# EAGLE board coil-control-module-v1 (EAGLE 7.1.0)
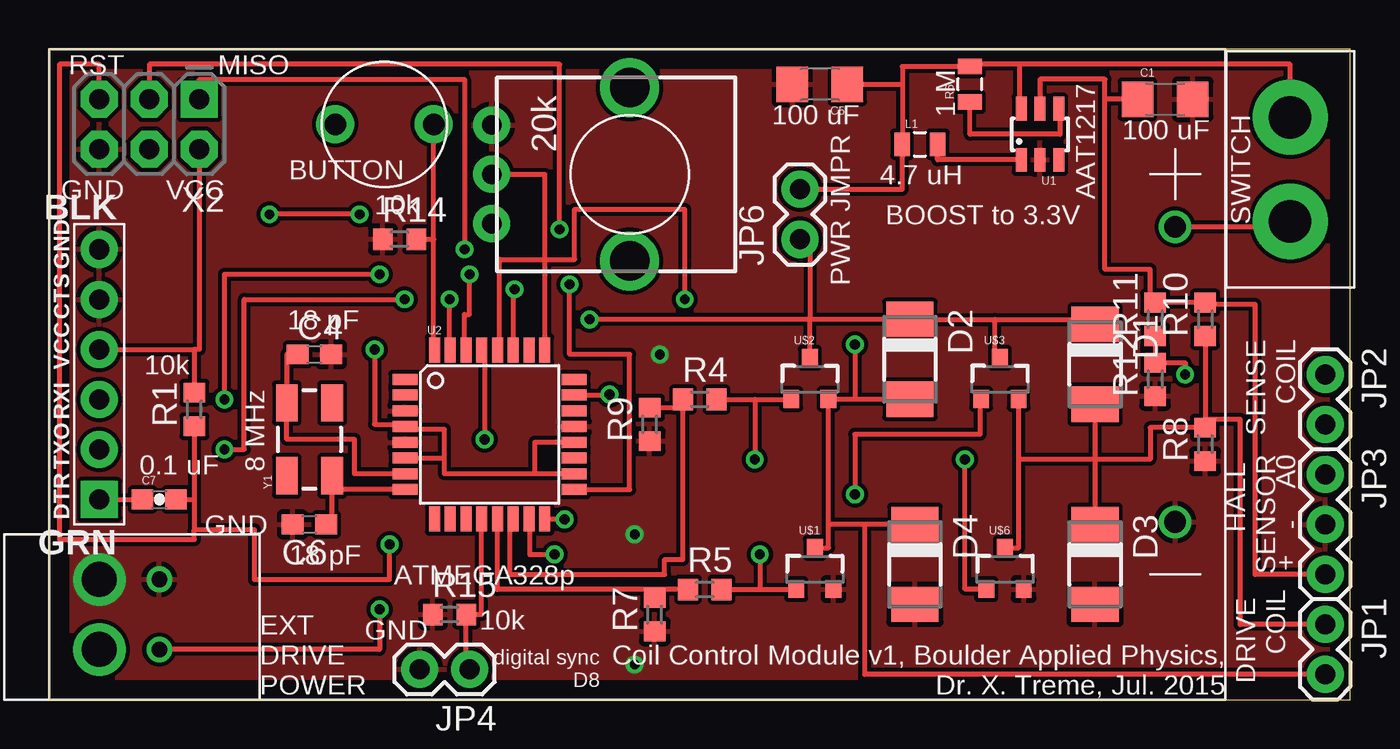
[diagram p0: board, top side]
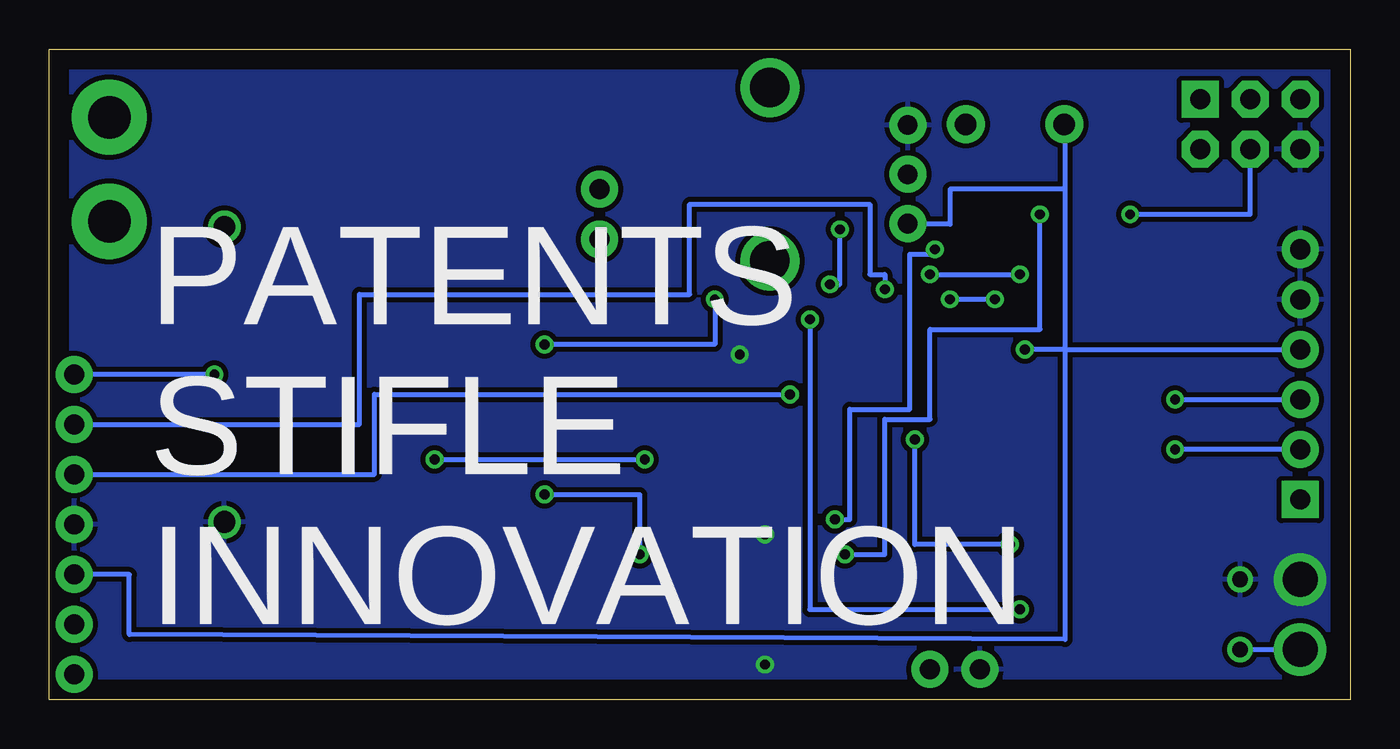
[diagram p1: board, bottom side, seen from below]

Size 66.04 x 33.02 mm. Coordinates in mm from the lower left corner, seen from the top.
Outline: 0,0 66.04,0 66.04,33.02 0,33.02 0,0
Copper layers (1*16): Top 0.035mm / dielectric 1.5mm / Bottom 0.035mm
Design rules "default": minimum track width 10mil, minimum drill 24mil, track to track 8mil, track to pad 8mil, pad to pad 8mil, via to via 8mil, smd to smd 8mil, copper to edge 40mil, drill to drill 8mil, minimum pad ring 10mil, minimum via ring 8mil, stop-mask expansion 4mil, vias tented up to drill 0mil, thermal gap 10mil
Net classes: 1 vcc: width 0.254 mm

## Footprints (pad centres in the part's own frame; a part is rotated, then mirrored left to right if it is on the bottom)
1206 = smd 1.6 x 1.8: 1 -1.4,0; 2 1.4,0
C0603 = smd 1.1 x 1: 1 -0.85,0; 2 0.85,0
0603-CAP = smd 1.1 x 1: 1 -0.85,0; 2 0.85,0
DO-214AC = smd 1.8 x 2.4: A 2.025,0; C -2.025,0
1X02 = drill 1.016 pad 1.88: 1 0,0; 2 2.54,0
1X03 = drill 1.016 pad 1.88: 1 0,0; 2 2.54,0; 3 5.08,0
0805 = smd 0.8 x 1.2: 1 -0.9,0; 2 0.9,0
R0603 = smd 1 x 1.1: 1 -0.85,0; 2 0.85,0
ALPS_POT_KIT = drill 1 pad 1.88: P$1 7,-2.5; P$2 7,0; P$3 7,2.5 | drill 2: P$4 0,-4.4; P$5 0,4.4
SSOT23-6 = smd 0.55 x 1.2: 1 0.95,1.3; 2 0,1.3; 3 -0.95,1.3; 4 -0.95,-1.3; 5 0,-1.3; 6 0.95,-1.3
TQFP32-08 = smd 1.27 x 0.559: 1 -4.293,2.8; 2 -4.293,2; 3 -4.293,1.2; 4 -4.293,0.4; 5 -4.293,-0.4; 6 -4.293,-1.2; 7 -4.293,-2; 8 -4.293,-2.8; 17 4.293,-2.8; 18 4.293,-2; 19 4.293,-1.2; 20 4.293,-0.4; 21 4.293,0.4; 22 4.293,1.2; 23 4.293,2; 24 4.293,2.8 | smd 0.559 x 1.27: 9 -2.8,-4.293; 10 -2,-4.293; 11 -1.2,-4.293; 12 -0.4,-4.293; 13 0.4,-4.293; 14 1.2,-4.293; 15 2,-4.293; 16 2.8,-4.293; 25 2.8,4.293; 26 2,4.293; 27 1.2,4.293; 28 0.4,4.293; 29 -0.4,4.293; 30 -1.2,4.293; 31 -2,4.293; 32 -2.8,4.293
SOT-23 = smd 0.8 x 0.9: 1 -0.95,-1; 2 0.95,-1; 3 0,1.1
AA-DOUBLE-UPSIDE-DOWN = drill 1.1: + 2.54,9.017; - 2.54,24.003
CW182-ND = drill 2.159 pad 3.81: P$1 -2.642,0; P$2 2.642,0
BUTTON = drill 1.1 pad 1.93: P$1 -2.499,0; P$2 2.499,0
SPRING-TERMINAL = drill 0.8: P$1 5.08,1.778; P$2 5.08,5.334
FTDI_DEVICE_SIDE = drill 1.016 pad 1.88 square: P$1 -6.35,0 | drill 1.016 pad 1.88: P$2 -3.81,0; P$3 -1.27,0; P$4 1.27,0; P$5 3.81,0; P$6 6.35,0
2X3-NS = drill 1.016 pad 1.88 square: 1 -2.54,-1.27 | drill 1.016 pad 1.88 octagon: 2 -2.54,1.27; 3 0,-1.27; 4 0,1.27; 5 2.54,-1.27; 6 2.54,1.27
CRYSTAL-SMD-5X3 = smd 1.9 x 1.1: 1 -1.85,-1.15; 2 1.85,-1.15; 3 1.85,1.15; 4 -1.85,1.15

## Placement (x,y rotation side)
C1  100 uF  [1206]  56.64,30.48 0 top
C4  18pF  [C0603]  13.46,17.53 0 top
C5  100 uF  [1206]  39.12,31.24 180 top
C6  18pF  [C0603]  13.21,8.89 180 top
C7  100 nF  [0603-CAP]  5.59,10.16 0 top
D1  [DO-214AC]  53.09,17.02 270 top
D2  [DO-214AC]  43.69,17.27 270 top
D3  [DO-214AC]  53.09,6.86 270 top
D4  [DO-214AC]  43.94,6.86 270 top
JP1  M02PTH  [1X02]  64.77,3.81 270 top
JP2  M02PTH  [1X02]  64.77,16.51 270 top
JP3  [1X03]  64.77,11.43 270 top
JP4  M02PTH  [1X02]  21.34,1.52 180 top
JP6  M02PTH  [1X02]  38.1,23.37 90 top
L1  4.7 uH  [0805]  44.2,28.19 0 top
R1  10K  [R0603]  7.37,14.73 90 top
R4  10K  [R0603]  33.02,15.24 0 top
R5  10K  [R0603]  33.27,5.59 0 top
R6  1M  [0805]  46.74,31.24 90 top
R7  10K  [R0603]  30.73,4.32 90 top
R8  10K  [R0603]  58.67,12.95 90 top
R9  10K  [R0603]  30.48,13.97 90 top
R10  10K  [R0603]  58.67,19.3 90 top
R11  10K  [R0603]  56.13,19.3 90 top
R12  10K  [R0603]  56.13,16.26 90 top
R13  20k  [ALPS_POT_KIT]  29.46,26.67 180 top
R14  10K  [R0603]  17.78,23.37 0 top
R15  10K  [R0603]  20.32,4.32 0 top
U1  AAT1217  [SSOT23-6]  50.29,28.7 180 top
U2  ATMEGA328P  [TQFP32-08]  22.35,13.46 0 top
U$1  IRLML0060  [SOT-23]  38.86,6.6 0 top
U$2  IRLML0060  [SOT-23]  38.61,16.26 0 top
U$3  IRLML0060  [SOT-23]  48.26,16.26 0 top
U$4  AA-DOUBLE-UPSIDE-DOWN  [AA-DOUBLE-UPSIDE-DOWN]  59.69,33.02 180 top
U$5  CW182-ND  [CW182-ND]  62.99,26.92 270 top
U$6  IRLML0060  [SOT-23]  48.51,6.6 0 top
U$7  BUTTON  [BUTTON]  17.02,29.21 0 top
U$8  SPRING-TERMINAL  [SPRING-TERMINAL]  10.67,7.87 180 top
X1  FTDI_DEVICE  [FTDI_DEVICE_SIDE]  2.54,16.51 90 top
X2  [2X3-NS]  5.08,29.21 180 top
Y1  16 MHz  [CRYSTAL-SMD-5X3]  13.21,13.21 90 top

## Library data of the parts
C1 C5 = SparkFun-Capacitors
C4 C6 R1 R4 R5 R7-R12 R14 R15 = resistor
C7 L1 R6 = SparkFun-Passives
D1-D4 = diode
JP1-JP4 JP6 X1 X2 = SparkFun-Connectors
R13 = SparkFun-Electromechanical
U1 U$1-U$8 = spietz-library
U2 = SparkFun-DigitalIC; PROD_ID: IC-09069
Y1 = SparkFun-FreqCtrl

## Nets
/RST: C7.2 R1.1 U2.29 X2.5
A0: JP3.1 U2.23
A2: R13.P$2 U2.25
COILA: D1.A D3.C JP1.1 R8.2 R10.1 U$3.2 U$6.3
COILB: D2.A D4.C JP1.2 U2.28 U$1.3 U$2.2
D2: R14.2 U2.32 U$7.P$2
D5: U2.9
D6: U2.10
D8: JP4.1 R15.2 U2.12
D9: R5.1 R7.2 U2.13
D10: R4.1 R9.2 U2.14
GND: C1.2 C4.2 C5.2 C6.2 D3.A D4.A JP3.2 JP4.2 R7.1 R8.1 R9.1 R12.1 R13.P$1 R14.1 R15.1 U1.2 U2.3 U2.5 U2.21 U$1.2 U$4.- U$6.2 U$8.P$1 X1.P$5 X1.P$6 X2.6
GRN: C7.1 X1.P$1
MISO: U2.16 X2.1
MOSI: U2.15 X2.4
N$4: C4.1 U2.7 Y1.3
N$11: C6.1 U2.8 Y1.1
N$13: JP2.1 R11.1 R12.2
N$14: L1.2 U1.1
N$26: R5.2 U$1.1 U$3.1
N$27: R4.2 U$2.1 U$6.1
RX: U2.30 X1.P$3
SCK: U2.17 X2.3
SENSECOIL: JP2.2 U2.27
SHDN: R6.1 U1.4
TX: U2.31 X1.P$2
VBATT+: U$4.+ U$5.P$2
VCC: C1.1 JP3.3 R1.2 R10.2 R11.2 R13.P$3 U1.5 U2.4 U2.6 U2.18 U2.20 U$7.P$1 X1.P$4 X2.2
VPOWER: D1.C D2.C JP6.1 U$2.3 U$3.3 U$8.P$2
VPOWERBATT: C5.1 JP6.2 L1.1 R6.2 U1.6 U$5.P$1

## Tracks (layer width: path | path; a pad name or v marks a point on that pad's centre or on a via)
/RST  (via drill 0.5)
  Top 0.254: C7.2 7.37,10.16 | U2.29 22.1,17.75 v22.1,13.21 | R1.1 7.37,10.16 | 7.37,10.16 7.37,8.64 | 7.37,8.64 10.41,8.64 10.41,6.1 17.27,6.1 v17.27,7.87 | X2.5 2.54,32.26 0.51,32.26 0.51,8.13 7.37,8.13 7.37,8.64
  Bottom 0.254: v17.27,7.87 22.1,7.87 v22.1,13.21
A0  (via drill 0.5)
  Top 0.254: U2.23 28.19,15.46 v28.45,15.49
  Bottom 0.254: JP3.1 49.53,11.43 49.53,15.49 v28.45,15.49
A2
  Top 0.254: R13.P$2 25.15,26.67 U2.25
COILA
  Top 0.254: U$6.3 49.21,7.7 49.21,12.19 | 49.21,12.19 U$3.2 | 53.09,12.19 D3.C | D1.A 53.09,12.19 | 53.09,12.19 49.21,12.19 | R10.1 58.67,14.22 | 53.09,12.19 55.88,12.19 55.88,13.8 R8.2 58.67,14.22 | JP1.1 60.45,3.81 60.45,14.22 58.67,14.22
COILB  (via drill 0.5)
  Top 0.254: 40.89,15.26 U$2.2 39.56,8.88 | 40.89,15.26 44.2,15.26 44.2,14.99 43.69,14.99 D2.A | U$1.3 39.56,7.7 39.56,8.88 | D4.C 41.4,8.88 | 41.4,8.88 39.56,8.88 | JP1.2 41.4,1.27 41.4,8.88 | U2.28 22.86,17.75 22.86,22.35 26.67,22.35 26.67,24.89 32.26,24.89 v32.26,20.32 | v40.89,18.03 40.89,15.26
  Bottom 0.254: v32.26,20.32 32.26,18.03 v40.89,18.03
D2
  Top 0.254: U2.32 19.52,17.75 19.52,23.37 | 19.52,23.37 U$7.P$2 | R14.2 19.52,23.37
D8
  Top 0.254: JP4.1 21.17,1.52 R15.2 21.95,4.32 U2.12
D9
  Top 0.254: R5.1 30.73,5.59 | 30.73,5.59 R7.2 | 30.73,5.59 22.75,5.59 U2.13
D10
  Top 0.254: R9.2 32.17,14.82 R4.1 32.17,7.11 31.24,7.11 31.24,6.35 23.37,6.35 23.37,9.17 U2.14
GND  (via drill 0.5, 1.78)
  other vias: 29.72,8.38 29.72,1.78 2.54,6.1 30.99,17.53
  pour Top (isolate 0.152): -1.27,35.31 -1.27,-1.27 67.56,-1.52 67.56,34.8
  pour Bottom (isolate 0.254): -2.54,36.2 -2.54,-2.54 69.34,-1.78 69.6,36.45
GRN
  Top 0.254: X1.P$1 C7.1
MISO  (via drill 0.5)
  Top 0.254: X2.1 7.62,31.5 21.08,31.5 v21.08,22.86 | U2.16 26.16,9.17 v26.16,9.14
  Bottom 0.254: v26.16,9.14 25.4,9.14 25.4,14.73 22.35,14.73 22.35,22.61 21.08,22.61 v21.08,22.86
MOSI  (via drill 0.5)
  Top 0.254: U2.15 24.38,9.17 24.38,7.37 v25.65,7.37 | v15.75,24.64 v11.18,24.64
  Bottom 0.254: v25.65,7.37 23.62,7.37 23.62,14.22 21.34,14.22 21.34,18.8 15.75,18.8 v15.75,24.64 | v11.18,24.64 5.08,24.64 X2.4
N$4
  Top 0.254: U2.7 15.49,11.46 15.49,13.21 12.06,13.21 Y1.3 12.06,17.53 C4.1
N$11
  Top 0.254: U2.8 14.87,10.66 Y1.1 14.36,8.89 C6.1
N$13  (via drill 0.5)
  Top 0.254: R11.1 R12.2 57.66,17.11 v57.66,16.51
  Bottom 0.254: v57.66,16.51 JP2.1
N$14
  Top 0.254: U1.1 45.1,27.4 L1.2
N$26  (via drill 0.5)
  Top 0.254: R5.2 36.07,5.59 | 36.07,5.59 37.91,5.59 U$1.1 | U$3.1 47.24,15.26 47.24,13.46 40.89,13.46 v40.89,10.41 | v36.07,7.37 36.07,5.59
  Bottom 0.254: v40.89,10.41 36.07,10.41 v36.07,7.37
N$27  (via drill 0.5)
  Top 0.254: R4.2 35.81,15.24 | 35.81,15.24 37.66,15.24 U$2.1 | U$6.1 46.48,5.6 v46.48,12.19 | 35.81,15.24 v35.81,12.19
  Bottom 0.254: v46.48,12.19 v35.81,12.19
RX  (via drill 0.5)
  Top 0.254: U2.30 21.08,17.75 21.08,19.56 21.34,19.56 v21.34,21.59 | v16.76,21.59 8.89,21.59 v8.89,15.24
  Bottom 0.254: v21.34,21.59 v16.76,21.59 | v8.89,15.24 X1.P$3
SCK  (via drill 0.5)
  Top 0.254: U2.17 29.46,10.66 29.46,17.53 26.42,17.53 v26.42,21.08 | v25.91,23.88 25.91,32.26 5.08,32.26 X2.3
  Bottom 0.254: v26.42,21.08 25.91,21.08 v25.91,23.88
SENSECOIL  (via drill 0.5)
  Top 0.254: v23.62,20.83 23.55,20.83 U2.27
  Bottom 0.254: JP2.2 50.29,13.97 50.29,20.57 33.53,20.57 33.53,25.15 24.38,25.15 24.38,21.59 23.62,21.59 v23.62,20.83
SHDN
  Top 0.254: U1.4 51.31,30 51.31,28.7 46.74,28.7 R6.1
TX  (via drill 0.5)
  Top 0.254: U2.31 20.32,17.75 v20.32,20.32 | v8.89,12.7 9.91,12.7 9.91,20.32 v18.03,20.32
  Bottom 0.254: X1.P$2 v8.89,12.7 | v18.03,20.32 v20.32,20.32
VBATT+
  Top 0.254: U$4.+ 62.99,24 U$5.P$2
VCC  (via drill 0.5)
  Top 0.254: X1.P$4 7.37,17.78 | 7.37,17.78 R1.2 | U2.6 20.07,12.26 | 20.07,12.26 20.07,13.72 18.06,13.72 U2.4 18.06,13.97 16.51,13.97 v16.51,17.78 | U2.18 24.64,11.46 | 24.64,11.46 20.07,11.46 20.07,12.26 | U2.20 24.64,13.06 24.64,11.46 | JP3.3 61.21,6.35 61.21,20.07 58.67,20.07 R10.2 R11.2 55.88,20.15 55.88,21.84 53.59,21.84 53.59,30.48 | 53.59,30.48 53.59,31.5 50.29,31.5 U1.5 | X2.2 7.62,17.78 7.37,17.78 | C1.1 53.59,30.48
  Bottom 0.254: U$7.P$1 14.48,29.21 14.48,25.91 | 14.48,25.91 20.32,25.91 20.32,24.13 22.46,24.13 R13.P$3 | 14.48,25.91 14.48,17.78 | 14.48,17.78 X1.P$4 | 14.48,17.78 14.48,3.05 61.98,3.3 61.98,6.35 JP3.3 | 14.48,17.78 v16.51,17.78
VPOWER  (via drill 0.5, 1.78)
  Top 0.254: 48.01,19.3 D2.C 38.61,19.3 | 48.01,19.3 53.59,19.3 D1.C | U$3.3 48.01,17.36 48.01,19.3 | JP6.1 38.61,23.37 38.61,19.3 | 38.61,19.3 | U$2.3 38.61,19.3 | 38.61,19.3 v27.43,19.3 | v16.76,4.57 16.76,2.54 U$8.P$2
  Bottom 0.254: v27.43,19.3 27.43,4.57 v16.76,4.57 | U$8.P$2 v2.54,2.54
VPOWERBATT
  Top 0.254: JP6.2 43.3,25.91 L1.1 43.3,31.24 | C5.1 43.3,31.24 | 43.3,31.24 43.3,32.14 R6.2 46.74,32.26 49.28,32.26 | U$5.P$1 62.99,32.26 49.28,32.26 | U1.6 49.28,30 49.28,32.26

## Text on the board
tPlace: RST | MISO | 1 M | 100 uF | PWR JMPR | 100 uF | BUTTON | GND | VCC | 10k | 4.7 uH | BOOST to 3.3V | AAT1217 | SWITCH | 18 pF | 10k | SENSE / COIL | 8 MHz | 0.1 uF | HALL / SENSOR | A0 | - | GND | 18 pF | ATMEGA328p | + | DRIVE / COIL | 10k | GND | digital sync / D8 | Coil Control Module v1, Boulder Applied Physics, / Dr. X. Treme, Jul. 2015 | EXT / DRIVE / POWER
bPlace: PATENTS / STIFLE / INNOVATION